# EAGLE board phoenixRev2 (EAGLE 8.5.2)
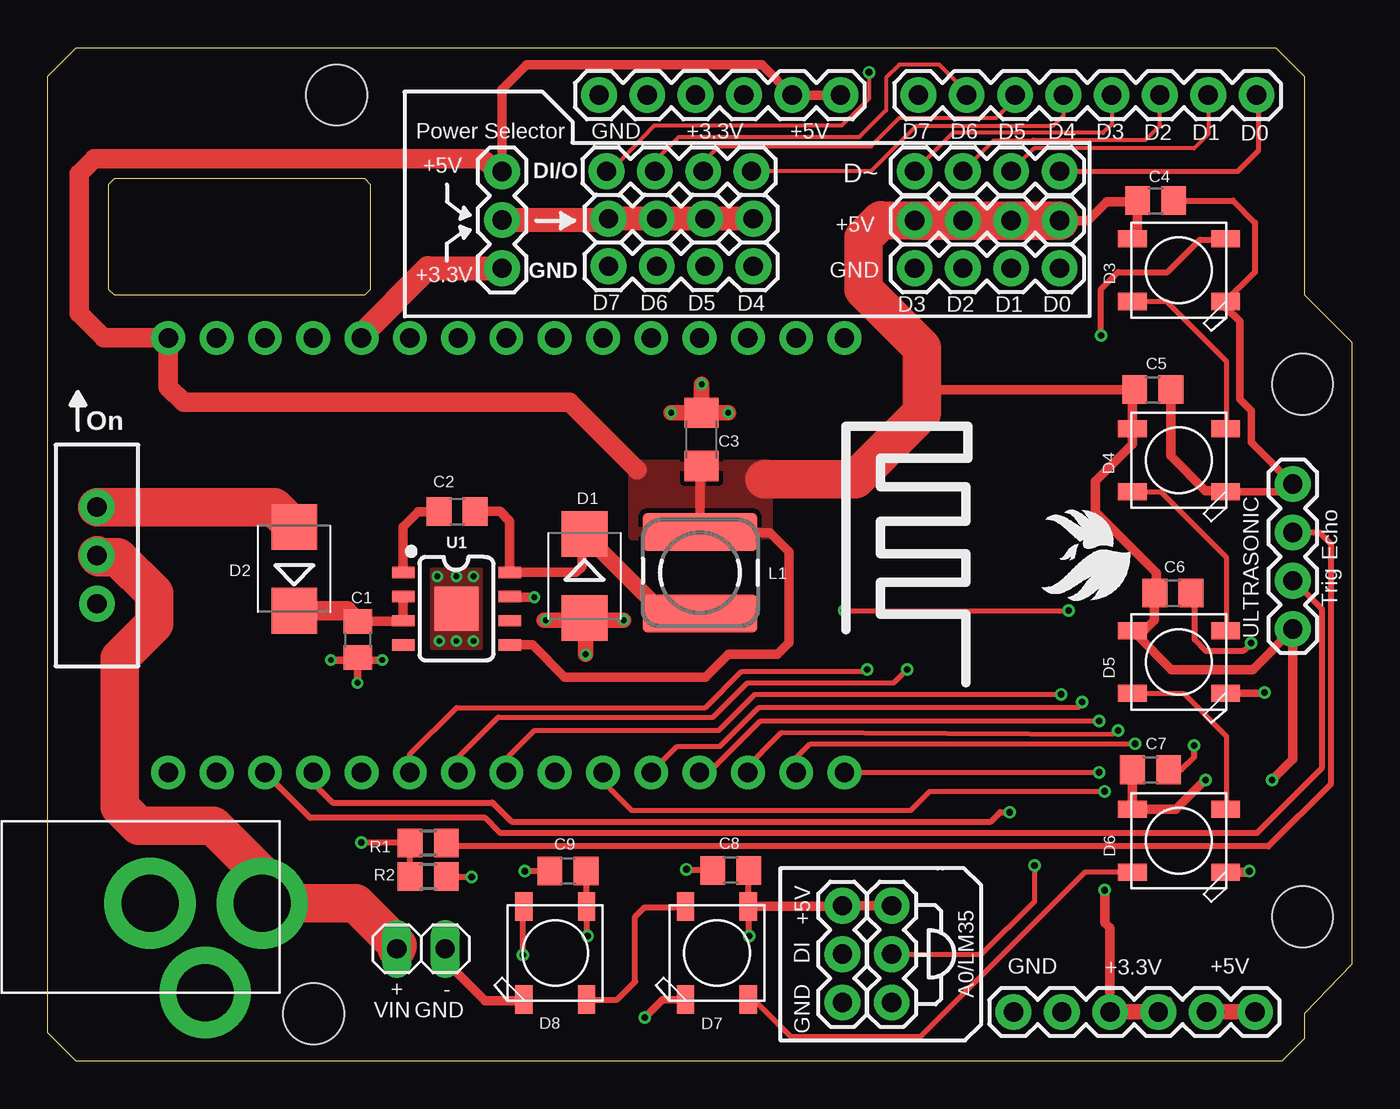
[diagram p0: board, top side]
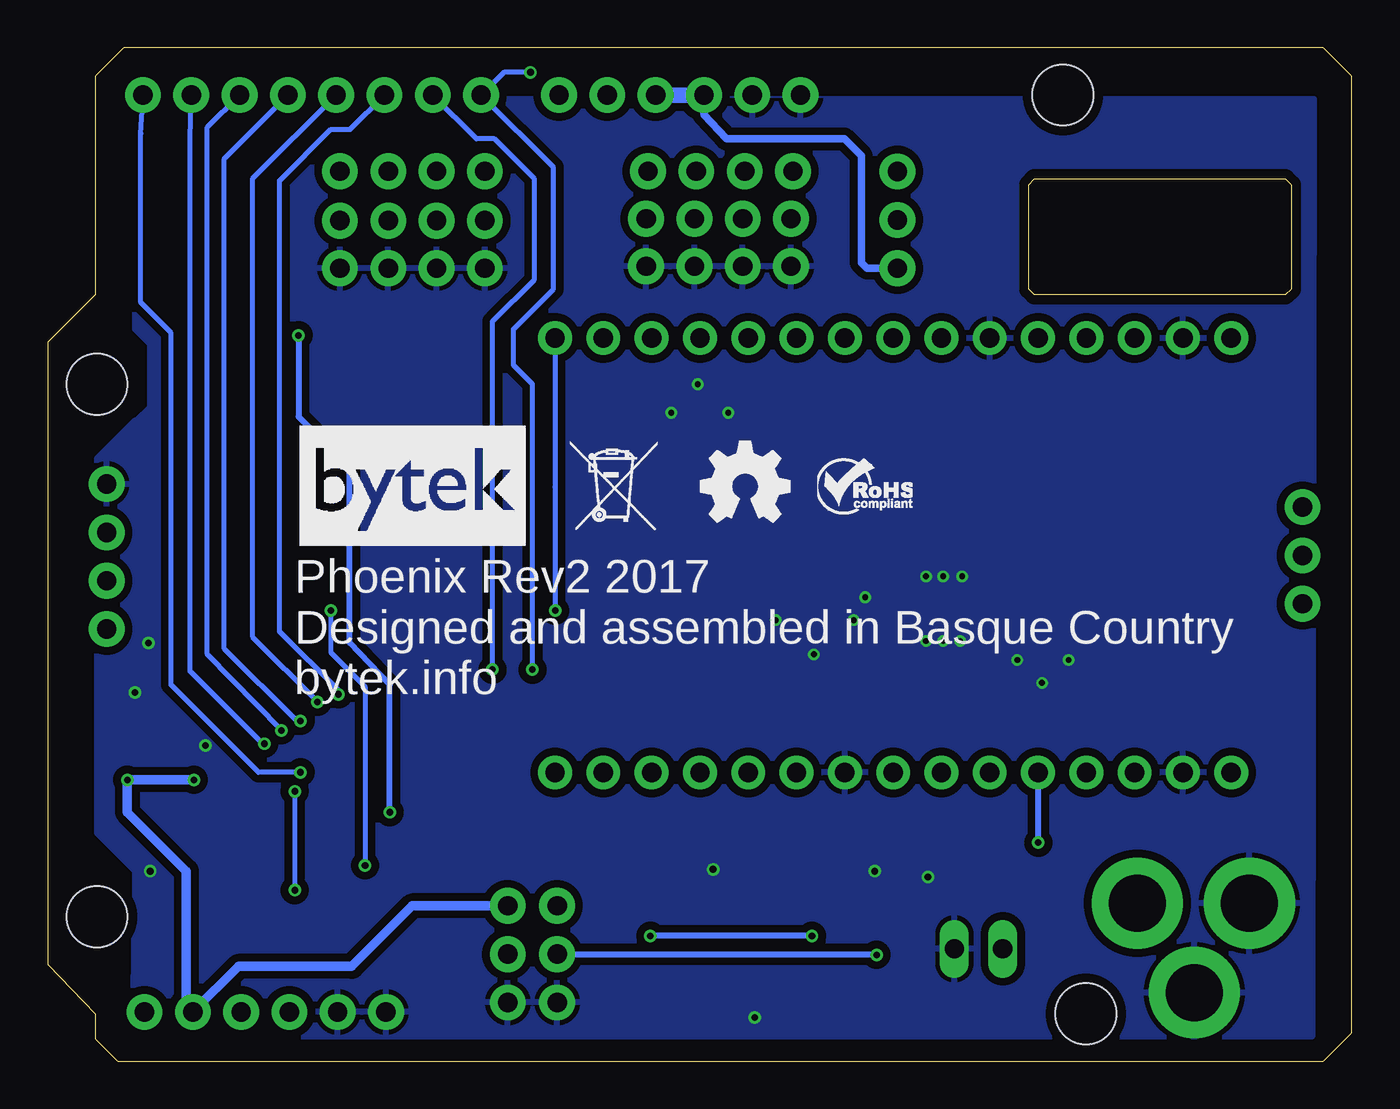
[diagram p1: board, bottom side, seen from below]

Size 68.6 x 53.3 mm. Coordinates in mm from the lower left corner, seen from the top.
Outline: 66.1,2.5 66.1,1.2 64.9,0 1.5,0 0,1.5 0,51.8 1.5,53.3 64.6,53.3 66.1,51.8 66.1,40.3 68.6,37.8 68.6,5.1 66.1,2.5
Outline: 17,40.6 17,46.1 16.7,46.4 3.5,46.4 3.2,46.1 3.2,40.6 3.5,40.3 16.7,40.3 17,40.6
Copper layers (1*16): Top 0.035mm / dielectric 1.5mm / Bottom 0.035mm
Design rules "pcbway": minimum track width 6mil, minimum drill 0.2mm, track to track 6mil, track to pad 6mil, pad to pad 6mil, via to via 6mil, smd to smd 6mil, copper to edge 20mil, drill to drill 8mil, minimum pad ring 10mil, minimum via ring 6mil, stop-mask expansion 4mil, vias tented up to drill 0mil, thermal gap 10mil
Holes 3.2 mm at 15.2,50.8 14,2.5 66,35.6 66,7.6

## Footprints (pad centres in the part's own frame; a part is rotated, then mirrored left to right if it is on the bottom)
C0805 = smd 1.3 x 1.5: 1 -0.95,0; 2 0.95,0
C1206 = smd 1.6 x 1.8: 1 -1.4,0; 2 1.4,0
SMB = smd 2.4 x 2.4: A 2.2,0; C -2.2,0
WS2812B = smd 1.5 x 0.9: 1-VDD 2.45,-1.65; 2-DOUT 2.45,1.65; 3-GND -2.45,1.65; 4-DIN -2.45,-1.65
PJ-102A = drill 3 pad 4.8: RING 0.1,-3.39; RING_SW -4.6,-6.29; TIP 0.1,-9.29
1X02 = drill 1.016 long: 1 -1.27,0; 2 1.27,0
1X03 = drill 1.016 pad 1.88: 1 0,0; 2 2.54,0; 3 5.08,0
1X04 = drill 1.016 pad 1.88: 1 0,0; 2 2.54,0; 3 5.08,0; 4 7.62,0
1X08 = drill 1.016 pad 1.88: 1 0,0; 2 2.54,0; 3 5.08,0; 4 7.62,0; 5 10.16,0; 6 12.7,0; 7 15.24,0; 8 17.78,0
1X06 = drill 1.016 pad 1.88: 1 0,0; 2 2.54,0; 3 5.08,0; 4 7.62,0; 5 10.16,0; 6 12.7,0
1X15-CB = drill 1.016 pad 1.778: 1 -17.78,0; 2 -15.24,0; 3 -12.7,0; 4 -10.16,0; 5 -7.62,0; 6 -5.08,0; 7 -2.54,0; 8 0,0; 9 2.54,0; 10 5.08,0; 11 7.62,0; 12 10.16,0; 13 12.7,0; 14 15.24,0; 15 17.78,0
POWER-CHOKE_WE-TPC = smd 6 x 2: 1 0,2.15; 2 0,-2.15
R0805 = smd 1.3 x 1.5: 1 -0.95,0; 2 0.95,0
SWITCH_SPDT_PTH_11.6X4.0MM = drill 1.016 pad 1.88: 1 0,2.54; 2 0,0; 3 0,-2.54
SO08_PAD = smd 0.6 x 1.2: 1 -1.905,-2.8; 2 -0.635,-2.8; 3 0.635,-2.8; 4 1.905,-2.8; 5 1.905,2.8; 6 0.635,2.8; 7 -0.635,2.8; 8 -1.905,2.8 | smd 2.311 x 2.311: PAD 0,0

## Placement (x,y rotation side)
C1  10uF  [C0805]  16.31,22.18 270 top
C2  0.1uF  [C0805]  21.54,28.91 0 top
C3  47uF  [C1206]  34.39,32.7 90 top
C4  0.1uF  [C0805]  58.28,45.25 0 top
C5  0.1uF  [C0805]  58.12,35.31 0 top
C6  0.1uF  [C0805]  59.18,24.63 0 top
C7  0.1uF  [C0805]  58.01,15.33 0 top
C8  0.1uF  [C0805]  35.93,10.04 180 top
C9  0.1uF  [C0805]  27.36,10 180 top
D1  B330B  [SMB]  28.24,25.52 270 top
D2  B330B  [SMB]  12.98,25.89 90 top
D3  WS2812B5050  [WS2812B]  59.5,41.6 180 top
D4  WS2812B5050  [WS2812B]  59.5,31.6 180 top
D5  WS2812B5050  [WS2812B]  59.5,21 180 top
D6  WS2812B5050  [WS2812B]  59.5,11.6 180 top
D7  WS2812B5050  [WS2812B]  35.2,5.7 90 top
D8  WS2812B5050  [WS2812B]  26.7,5.7 90 top
J1  2.1MMJACKTHM  [PJ-102A]  2,8.22 90 top
J2  [1X02]  19.64,5.92 0 top
J3  [1X03]  41.8,3.1 90 top
J4  [1X03]  44.4,3.1 90 top
J5  [1X04]  45.6,41.7 0 top
J6  [1X04]  45.6,44.2 0 top
J7  [1X04]  45.6,46.8 0 top
J8  [1X04]  29.5,41.8 0 top
J9  [1X04]  29.5,44.3 0 top
J10  [1X04]  29.4,46.8 0 top
J11  [1X08]  45.8,50.8 0 top
J12  [1X06]  50.8,2.6 0 top
J13  [1X06]  29,50.8 0 top
J14  [1X03]  23.9,41.7 90 top
J15  [1X04]  65.49,30.35 270 top
J16  [1X15-CB]  24.13,38.03 180 top
J17  [1X15-CB]  24.13,15.19 180 top
L1  6.8uH SRN6045-6R8Y  [POWER-CHOKE_WE-TPC]  34.31,25.69 180 top
R1  10k  [R0805]  20.02,11.49 0 top
R2  15k  [R0805]  20.02,9.71 180 top
S1  450 302 014 072  [SWITCH_SPDT_PTH_11.6X4.0MM]  2.6,26.6 0 top
U1  ADP2303ARDZ-5.0-R7  [SO08_PAD]  21.51,23.8 270 top

## Library data of the parts
C1-C3 C5-C9 R1 R2 = rcl
C4 = rcl; TYPE: Ceramic
D1 D2 = diode
D3-D8 J1 J16 J17 = adafruit
J2 = pinhead
J3 J4 J14 = SparkFun-Connectors
J5-J10 J15 = SparkFun-Connectors; PROD_ID: CONN-09696
J11 = SparkFun-Connectors; PROD_ID: CONN-08438
J12 J13 = SparkFun-Connectors; PROD_ID: CONN-08437
L1 U1 = servoController
S1 = SparkFun-Switches; PROD_ID: SWCH-08261; SF_SKU: COM-00102

## Nets
+3V3: J13.3 J13.4 J14.1 J16.11
+3V3_R: J12.3 J12.4 J17.6
+5V: C3.1 C4.1 C5.1 C6.1 C7.1 C8.1 C9.1 D3.1-VDD D4.1-VDD D5.1-VDD D6.1-VDD D7.1-VDD D8.1-VDD J3.3 J4.3 J6.1 J6.2 J6.3 J6.4 J12.5 J12.6 J13.5 J13.6 J14.3 J15.4 J16.15 L1.2 U1.5
ADC0: J4.2 J16.1
D0: J7.4 J11.8 J17.1
D1: J7.3 J11.7 J17.2
D2: J7.2 J11.6 J17.3
D3: J7.1 J11.5 J17.4
D4: J10.4 J11.4 J17.5
D5: J10.3 J11.3 J17.8
D6: J10.2 J11.2 J17.9
D7: J10.1 J11.1 J17.10
D8: J17.11 R1.1 R2.2
D9: D3.4-DIN J17.12
D10: J15.3 J17.13
GND: C1.2 C3.2 C4.2 C5.2 C6.2 C7.2 C8.2 C9.2 D1.A D3.3-GND D4.3-GND D5.3-GND D6.3-GND D7.3-GND D8.3-GND J1.RING J1.RING_SW J2.2 J3.1 J4.1 J5.1 J5.2 J5.3 J5.4 J8.1 J8.2 J8.3 J8.4 J12.1 J12.2 J13.1 J13.2 J15.1 J16.10 J16.14 J17.7 J17.14 R2.1 U1.7 U1.PAD
N$1: D2.A S1.1
N$2: D6.2-DOUT D7.4-DIN
N$3: D7.2-DOUT D8.4-DIN
N$4: D8.2-DOUT J3.2
N$24: C2.1 U1.1
N$32: C2.2 D1.C L1.1 U1.8
N$33: C1.1 D2.C U1.2 U1.3
N$34: D3.2-DOUT D4.4-DIN
N$35: D4.2-DOUT D5.4-DIN
N$36: J1.TIP J2.1 S1.2
N$38: J15.2 R1.2
N$40: D5.2-DOUT D6.4-DIN
V_SW: J9.1 J9.2 J9.3 J9.4 J14.2

## Tracks (layer width: path | path; a pad name or v marks a point on that pad's centre or on a via)
+3V3
  Top 1.27: J16.11 16.51,38.21 20,41.7 J14.1
  Bottom 0.406: J13.3 34.08,49.78 32.9,48.5 26.7,48.5 25.8,47.6 25.8,42 25.5,41.7 J14.1
  Bottom 0.813: J13.4 J13.3
+3V3_R  (via drill 0.35)
  Top 0.254: v55.6,14.2 46.4,14.2 45.4,13.2 30.7,13.2 29.21,14.69 J17.6 | 59,3.24 58.26,2.6
  Top 0.508: J12.3 55.88,7.02 55.6,7.3 v55.6,9
  Top 0.813: J12.4 58.26,2.6 J12.3
  Bottom 0.254: v55.6,14.2 v55.6,9
+5V  (via drill 0.35)
  Top 0.305: C9.1 28.32,8.19 D8.1-VDD 28.35,6.65 v28.4,6.6 | D7.1-VDD 36.85,10.01 C8.1 | v36.9,6.6 36.9,7.7 36.85,7.75
  Top 0.406: 36.85,7.75 D7.1-VDD | J4.3 44.34,8.18
  Top 0.508: J14.3 23.9,51.1 25.2,52.4 37.56,52.4 J13.5 J13.6 | 64.5,14.8 v64.4,14.8 65.49,15.89 J15.4 63.38,20.6 59.1,20.6 57.2,22.5 57.35,22.65 D5.1-VDD 57.65,22.65 58.2,23.2 58.2,24.6 C6.1 58.3,24.7 58.3,25.7 55.1,28.9 55.1,30.5 57.05,32.45 D4.1-VDD 57.05,35.19 C5.1 46.06,35.31 45.99,35.38 | v60.9,14.8 59.35,13.25 D6.1-VDD C7.1 | D7.1-VDD 41.77,8.15 J3.3 J4.3 | C3.1 34.31,31.22 L1.2 34.35,27.8 38,27.8 39,26.8 39,22 38.4,21.4 35.8,21.4 34.6,20.2 27.2,20.2 25.5,21.89 U1.5 | J6.4 54.7,44.2 55.7,45.2 57.28,45.2 C4.1 57.33,43.53 D3.1-VDD | 28.3,8.1 D8.1-VDD
  Top 0.813: J12.5 J12.6
  Top 1.016: J14.3 24,46.8 23.8,46.8 22.84,47.44 2.44,47.44 1.66,46.66 1.66,39.34 2.94,38.06 6.34,38.06 6.4,38 J16.15 6.35,35.45 7.15,34.65 27.45,34.65 31,31.1
  Top 2.032: J6.4 J6.3 J6.2 J6.1 43.82,44.21 42.9,43.3 42.9,40.6 45.99,37.51 45.99,35.38 45.99,34.09 42.5,30.6 37.7,30.6
  Bottom 0.305: v28.4,6.6 v36.9,6.6
  Bottom 0.508: v60.9,14.8 v64.4,14.8 64.4,13.1 61.3,10 61.3,2.94 J12.5 58.56,5 52.6,5 49.42,8.18 J4.3
  pour Top (isolate 0.254): 30.8,31.4 37.9,31.4 37.9,27.7 30.8,27.6
ADC0  (via drill 0.35)
  Top 0.254: v41.9,23.7 v53.7,23.7 | v51.9,10.3 51.9,8.4 49.1,5.62 44.42,5.62 J4.2
  Bottom 0.254: J16.1 41.91,30.21 v41.9,23.7 | v53.7,23.7 53.7,21.5 51.9,19.7 v51.9,10.3
D0  (via drill 0.35)
  Top 0.254: J17.1 v55.29,15.19 v55.3,15.2 | J7.4 62.6,46.8 63.7,47.9 63.7,50.68 J11.8
  Bottom 0.254: v55.3,15.2 57.5,15.2 62.1,19.8 62.1,38.3 63.7,39.9 63.7,48.78 J11.8
D1  (via drill 0.35)
  Top 0.203: J11.7 61.04,48.74 60.3,48 51.88,48 J7.3
  Top 0.254: J17.2 39.37,15.97 40.1,16.7 v57.2,16.7
  Bottom 0.254: v57.2,16.7 57.4,16.8 61.1,20.5 61.1,48.44 J11.7
D2  (via drill 0.35)
  Top 0.203: J11.6 58.5,49.2 57.76,48.46 51.83,48.46 51.8,48.42 49.77,48.42 J7.2
  Top 0.254: J17.3 36.59,15.29 38.6,17.3 56,17.2 v56.3,17.4
  Bottom 0.254: v56.3,17.4 60.2,21.4 60.2,49.1 J11.6
D3  (via drill 0.35)
  Top 0.203: J11.5 55.96,49.26 55.51,48.81 47.61,48.81 J7.1
  Top 0.254: J17.4 34.79,15.19 37.5,17.9 v55.3,17.9
  Bottom 0.254: v55.3,17.9 55.5,17.9 59.3,21.7 59.3,47.46 J11.5
D4  (via drill 0.35)
  Top 0.203: J11.4 53.42,49.72 52.87,49.17 45.67,49.17 43.3,46.8 J10.4
  Top 0.254: J17.5 31.74,15.19 33.11,16.56 35.36,16.56 37.4,18.6 54.2,18.6 54.4,18.8 v54.4,18.9
  Bottom 0.254: J11.4 57.8,46.42 57.8,22.3 v54.4,18.9
D5  (via drill 0.35)
  Top 0.203: J11.3 50.88,50.58 49.9,49.6 44.81,49.6 | 44.81,49.6 44.8,49.6 | J10.3 34.48,47.28 35.3,48.1 43.31,48.1 44.81,49.6
  Top 0.254: J17.8 24.13,15.93 25.6,17.4 35.3,17.4 37.2,19.3 v53.3,19.3
  Bottom 0.254: v53.3,19.3 53.3,19.5 56.4,22.6 56.4,46.3 53.7,49 52.68,49 J11.3
D6  (via drill 0.35)
  Top 0.203: J10.2 31.94,47.34 33.2,48.6 42.7,48.6 44.1,50 44.1,51.7 44.8,52.4 46.9,52.4 48.34,50.96 J11.2
  Top 0.254: J17.9 21.59,15.99 23.7,18.1 35,18.1 36.8,19.9 44.5,19.9 v45.2,20.6
  Bottom 0.254: v45.2,20.6 45.2,38.9 43,41.1 43,46.4 45.1,48.5 46.04,48.5 J11.2
D7  (via drill 0.35)
  Top 0.203: J10.1 29.6,46.8 31.9,49.2 41.76,49.2 42.16,49.61 42.19,49.61 43.2,50.61 v43.2,52
  Top 0.254: J17.10 19.05,16.15 21.5,18.6 34.6,18.6 36.5,20.5 43.1,20.5 v43.1,20.6
  Bottom 0.254: v43.1,20.6 43.1,35.6 44.1,36.6 44.1,38.5 42,40.6 42,47 J11.1 44.6,52 v43.2,52
D8  (via drill 0.35)
  Top 0.305: R2.2 R1.1 v16.51,11.49 v16.5,11.5
  Bottom 0.305: v16.5,11.5 J17.11
D9  (via drill 0.35)
  Top 0.305: J17.12 13.97,14.63 15,13.6 23.4,13.6 24.4,12.6 49.6,12.6 50.1,13.1 v50.6,13.1 | v55.4,38.17 55.4,40.6 56.3,41.5 58.9,41.5 60.6,43.2 61.9,43.2 D3.4-DIN
  Bottom 0.305: v50.6,13.1 50.6,19.8 52.7,22 52.7,31.2 55.4,33.9 v55.4,38.17
D10
  Top 0.305: J15.3 65.53,25.27 67,23.8 67,15.4 63.6,12 23.8,12 23,12.8 13.82,12.8 J17.13
GND  (via drill 0.3, 0.35)
  Top 0.305: U1.PAD 22.1,24.39 | R2.1 22.09,9.71 22.1,9.7 v22.3,9.7 | C4.2 62.35,45.25 63.5,44.1 63.5,41.5 D3.3-GND | 61.9,30 D4.3-GND | C8.2 33.66,10.04 v33.6,10.1 | C9.2 v25.1,10 | v63.3,22 62.9,21.6 60.9,21.6 60.33,22.17 60.33,24.43 C6.2 | C7.2 59.63,15.33 60.3,16 v60.3,16.6
  Top 0.406: C1.2 16.24,21.1 v14.9,21.1 | C1.2 v16.3,19.9 | C1.2 16.44,21.1 v17.6,21.1 | D4.3-GND 65.09,29.95 J15.1 63.3,32.54 63.3,34.2 62.7,34.8 62.7,38.9 61.95,39.65 D3.3-GND | 20.78,5.92 J2.2 | 25,3.3 D8.3-GND | D7.3-GND 32.35,3.25 v31.4,2.3 | D5.3-GND 63.95,19.35 v64,19.4
  Top 0.508: U1.7 24.34,24.4 v25.6,24.4 | J2.2 20.91,5.29 23,3.2 25,3.2 D8.3-GND | D6.3-GND 63.15,9.95 v63.2,10 | C5.2 59.07,31.83 60.9,30 61.9,30
  Top 0.813: D1.A 28.3,23.26 v28.3,21.4 | D1.A 28.12,23.2 v26.2,23.2 26.1,23.2 | D1.A 28.36,23.2 v30.3,23.2 | v32.8,34.1 C3.2 | C3.2 v34.4,35.6 | C3.2 v35.8,34.1
  other vias: 20.5,25.5 22.4,25.5 20.6,22.1 22.4,22.1 21.5,25.5 21.5,22.1
  pour Top (no thermals): 20.2,25.9 22.8,25.9 22.8,21.7 20.2,21.7
  pour Bottom (isolate 0.406): 2.1,1.3 64.1,1.3 64,10 66,12 66,31.7 64,33.7 63.9,33.7 63.2,34.4 63.2,37.7 64,38.5 64,50.6 2,50.6
N$1
  Top 2.032: S1.1 11.93,29.14 D2.A
N$2
  Top 0.254: D7.4-DIN 37.15,3.25 39.1,1.3 45.9,1.3 54.55,9.95 D6.2-DOUT
N$3
  Top 0.305: D8.4-DIN 29.95,3.25 30.9,4.2 30.9,7.6 31.4,8.1 33.5,8.1 D7.2-DOUT
  Top 0.406: D7.2-DOUT 33.6,8.1
N$4  (via drill 0.35)
  Top 0.305: v25,5.6 25,8.1 D8.2-DOUT
  Bottom 0.254: 41.74,5.7 J3.2
  Bottom 0.305: J3.2 25.06,5.64 25,5.7 v25,5.6
N$24
  Top 0.508: U1.1 18.71,28.11 19.5,28.9 C2.1
N$32
  Top 0.508: C2.2 23.79,28.91 24.3,28.4 U1.8 27.8,25.7 28.1,26 28.1,27.58 D1.C | L1.1 32.42,23.54
  Top 0.813: D1.C 32.42,23.54
N$33
  Top 0.508: U1.2 U1.3 18.68,23.13 C1.1
  Top 1.016: D2.C 15.75,23.69 C1.1
N$34
  Top 0.254: D3.2-DOUT 58.85,39.95 62,36.8 62,33.3 D4.4-DIN
N$35
  Top 0.254: D4.2-DOUT 58.55,29.95 62,26.5 62,22.7 D5.4-DIN
N$36
  Top 2.032: S1.2 2.7,26.5 3.7,26.5 5.6,24.6 5.6,23 3.8,21.2 3.8,13.4 4.8,12.4 8.7,12.4 11.29,9.81 J1.TIP 16.19,8.32 16.19,8.31 18.4,6.1 J2.1
N$38
  Top 0.305: R1.2 21.16,11.3 64.2,11.3 67.5,14.6 67.5,27.2 66.9,27.8 J15.2
N$40
  Top 0.254: D5.2-DOUT 59.75,19.35 62,17.1 62,13.3 | 62,13.3 D6.4-DIN 62,13.3
V_SW
  Top 1.27: J14.2 29.44,44.24 J9.1 J9.2 J9.3 J9.4

## Text on the board
tPlace: Power Selector | GND | +3.3V | +5V | D7 | D6 | D5 | D4 | D3 | D2 | D1 | D0 | +5V | DI/O | D~ | +5V | +3.3V | GND | GND | D7 | D6 | D5 | D4 | D3 | D2 | D1 | D0 | On | ULTRASONIC | Echo | Trig | +5V | A0/LM35 | DI | GND | +3.3V | +5V | + | - | GND | VIN | GND
bPlace: Phoenix Rev2 2017 / Designed and assembled in Basque Country / bytek.info